# Altium PCB PCB1.PcbDoc
Units mm, origin at the board's own origin, x right, y up, seen from the top; angles counter-clockwise.
Board outline 99.95 x 99.82 mm, 2 copper layers (Top Layer, Bottom Layer); 25 components, 30 nets, 135 pads, 0 vias.
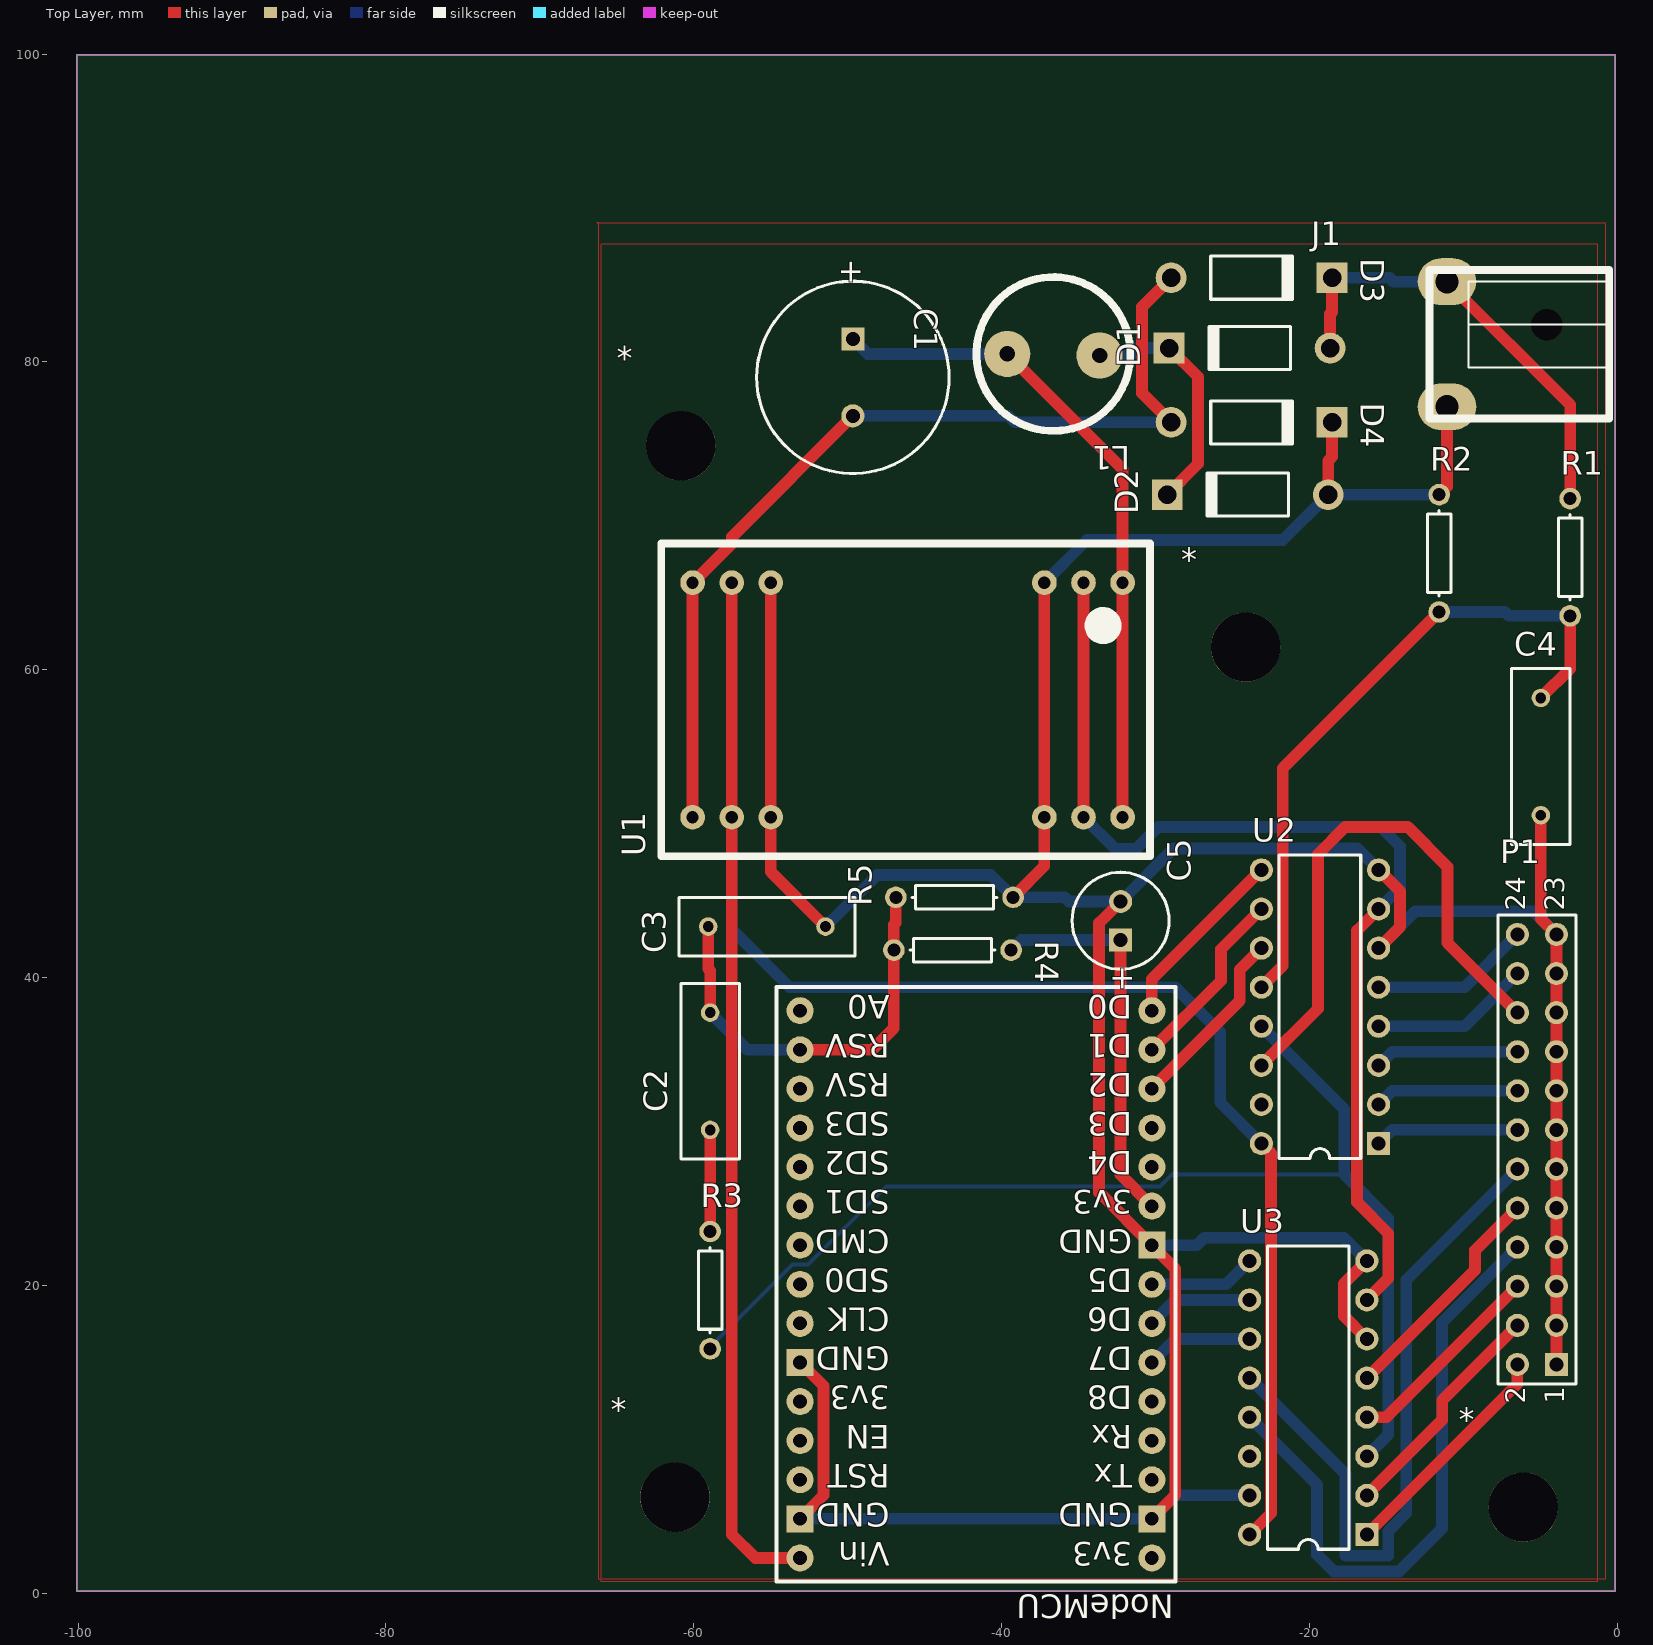
[diagram p0: Top Layer view]
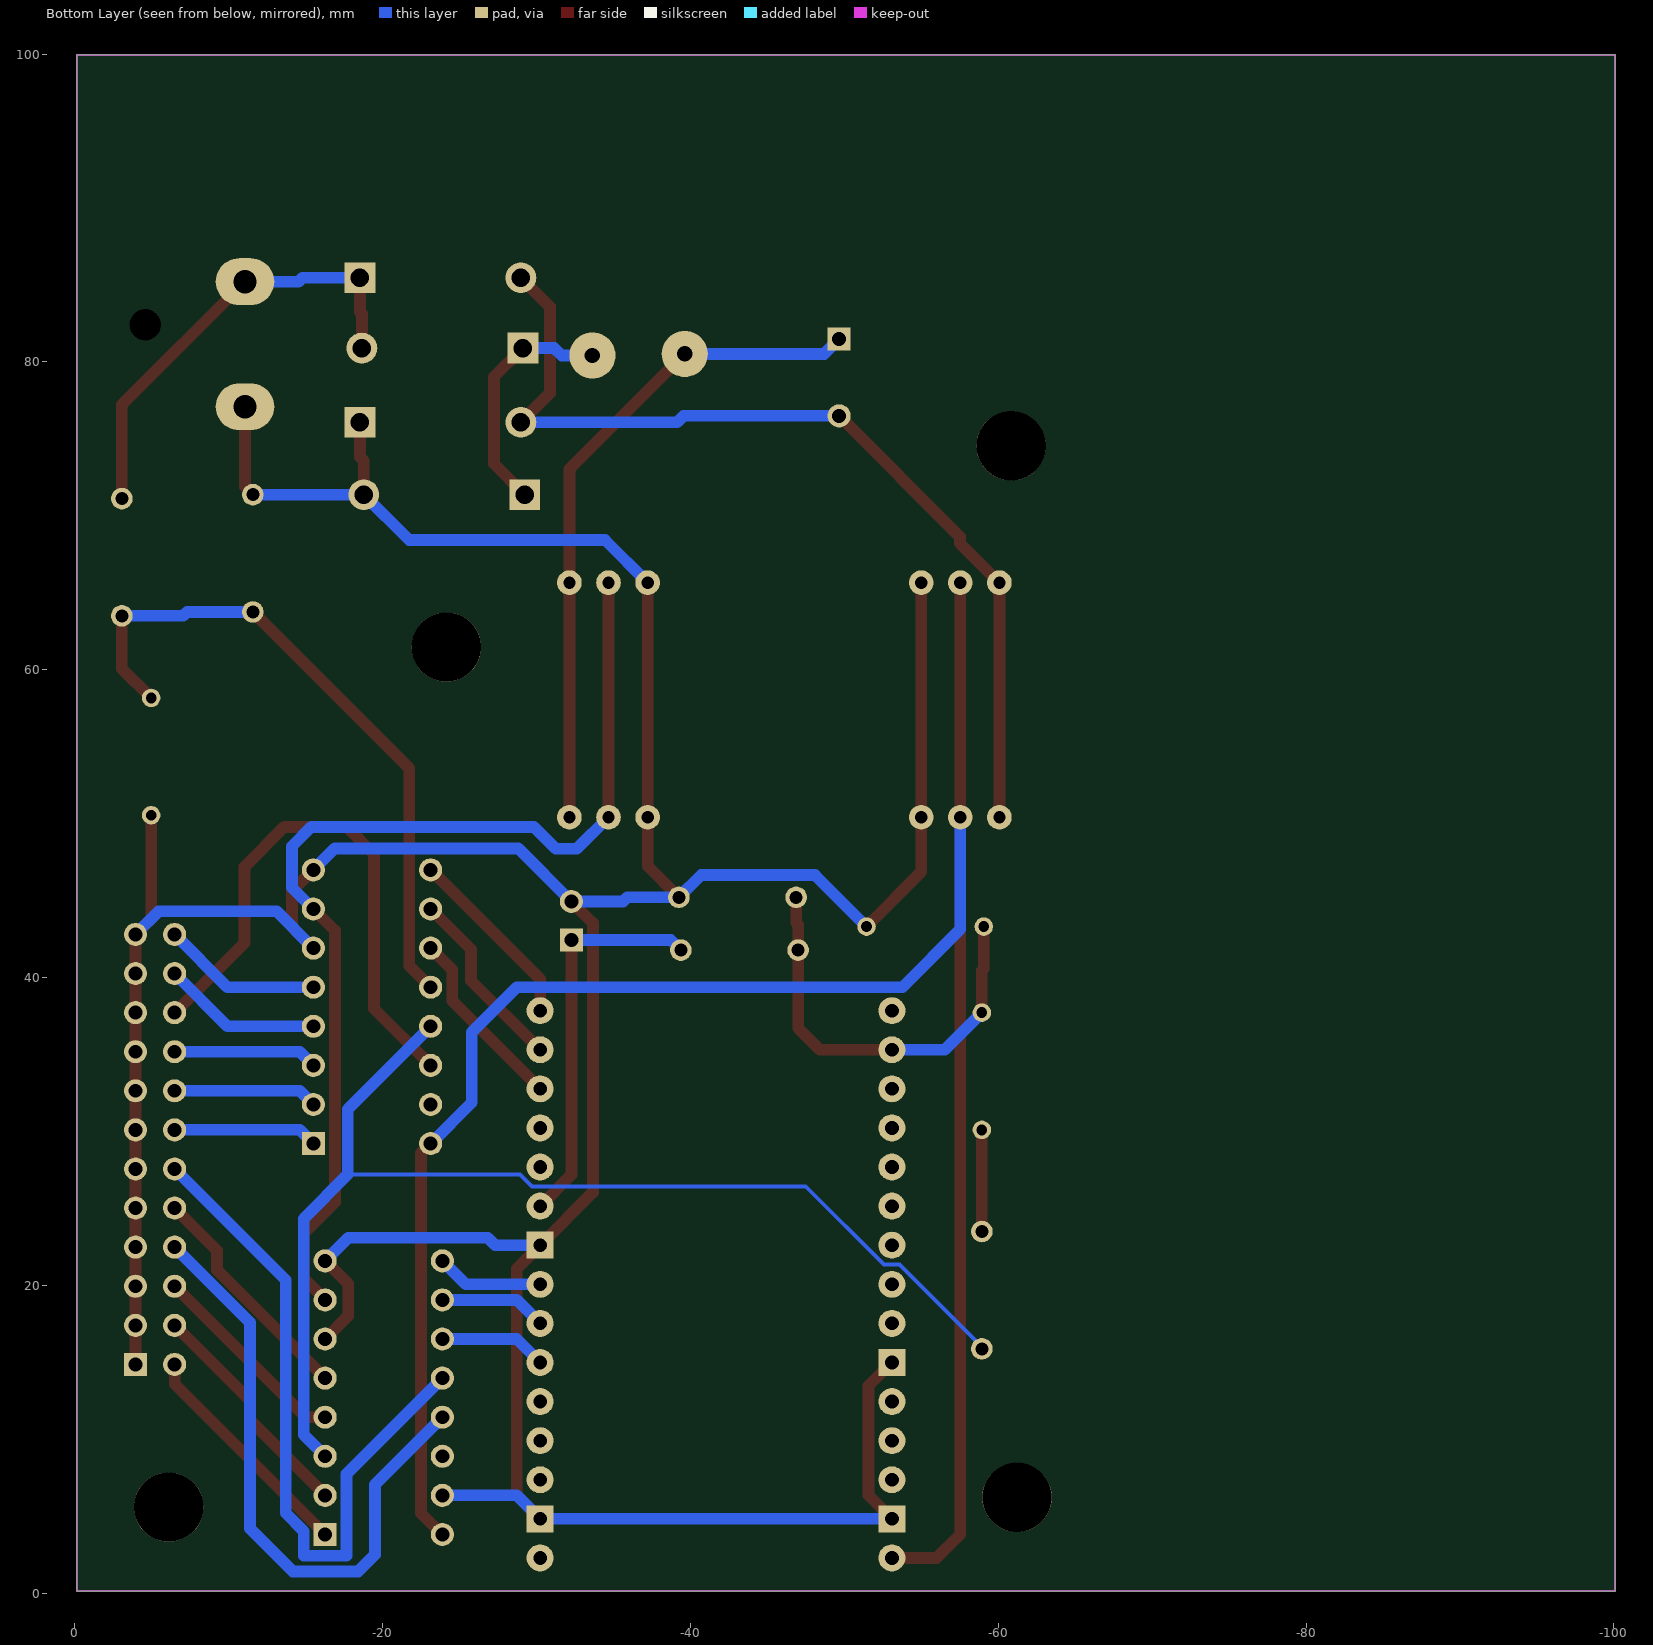
[diagram p1: Bottom Layer view, seen from below]

## Layer stack, top to bottom
Top Solder: solder mask 0.0102, Solder Resist, Dk 3.5
Top Layer: signal copper 0.0356
Dielectric 1: dielectric 0.32, FR-4, Dk 4.8
Bottom Layer: signal copper 0.0356
Bottom Solder: solder mask 0.0102, Solder Resist, Dk 3.5

## Board outline
-100.076,0.127 -0.127,0.127 -0.127,99.949 -100.076,99.949

## Design rules (kind name [scope] priority, off if disabled: settings)
Clearance [All] p1: gap=0.254
PolygonConnect [All] p1: connectstyle=Relief reliefconductorwidth=0.254 reliefentries=4 polygonreliefangle="90 Angle" airgapwidth=0.254
RoutingVias [All] p1: holewidth=0.711 width=1.27 viastyle="Through Hole" minholewidth=0.711 minwidth=1.27 maxholewidth=0.711 maxwidth=1.27
SolderMaskExpansion [All] p1: expansion=0.102
Width [All] p1: maxlimit=2.54 minlimit=0.178 preferedwidth=0.762
30 further rules are at their usual default settings.

## Classes and differential pairs
component class Sheet1: * C1 C2 C3 C4 C5 D1 D2 D3 D4 J1 L1 NodeMCU P1 R1 R2 R3 R4 R5 U1 U2 U3

## Components (designator, comment, footprint, x,y, rotation, side; value= is the part's Value field where it differs from the comment)
* "M4 iso mount hole" "M4 hole" -61.214,6.223 r0 top
* "M4 iso mount hole" "M4 hole" -24.13,61.468 r0 top
* "M4 iso mount hole" "M4 hole" -60.833,74.549 r0 top
* "M4 iso mount hole" "M4 hole" -6.096,5.588 r0 top
C1 "Cap Pol1" CAPPR5-12.5x25 -49.657,78.994 r270 top
C2 "Cap" RAD-0.3 -58.928,33.909 r270 top
C3 "Cap" RAD-0.3 -55.245,43.307 r180 top
C4 "Cap" RAD-0.3 -4.953,54.356 r90 top
C5 "Cap Pol1" CAPPR2.5-6.3x6.8/H.9 -32.258,43.688 r90 top
D1 "Diode 1N4001" DO-41 -23.876,80.899 r180 top
D2 "Diode 1N4001" DO-41 -24.003,71.374 r180 top
D3 "Diode 1N4001" DO-41 -23.749,85.471 r0 top
D4 "Diode 1N4001" DO-41 -23.749,76.073 r0 top
J1 "Phonejack2" "Power jack 6x2mm" -12.192,76.327 r0 top
L1 "Inductor Iron" "Radial Vert Cylinder 10x19-6mm" -36.624,80.518 r180 top
NodeMCU "NodeMCU DevKit v1.0" "NodeMCU DevKit v1.0 - Inside Labels" -30.226,2.286 r180 top
P1 "Header 12X2" HDR2X12 -3.937,14.859 r90 top
R1 "Res1" AXIAL-0.3 -3.048,67.31 r90 top
R2 "Res1" AXIAL-0.3 -11.557,67.564 r90 top
R3 "Res1" AXIAL-0.3 -58.928,19.685 r90 top
R4 "Res1" AXIAL-0.3 -43.18,41.783 r0 top
R5 "Res1" AXIAL-0.3 -43.053,45.212 r180 top
U1 "EC3AW04" EC3AW -30.353,68.199 r180 top
U2 "MC74HC4051N" 648-08 -19.304,38.1 r90 top
U3 "MC74HC4051N" 648-08 -20.066,12.7 r90 top

## Footprints (in the part's own frame and the unit in brackets; to place one, negate y for a bottom-side part, rotate by r counter-clockwise, add the part's x,y. Pads: shape width x height; smd on the part's side, far side on the other; paste and mask are expansions set on the pad)
648-08 [mm] "DIP; 16 Leads; Row Spacing 7.62 mm; Pitch 2.54 mm"
  rect 1.5x1.5 hole 0.9: 1(-8.89,-3.81)
  round 1.5 hole 0.9: 2(-6.35,-3.81) 3(-3.81,-3.81) 4(-1.27,-3.81) 5(1.27,-3.81) 6(3.81,-3.81) 7(6.35,-3.81) 8(8.89,-3.81) 9(8.89,3.81) 10(6.35,3.81) 11(3.81,3.81) 12(1.27,3.81) 13(-1.27,3.81) 14(-3.81,3.81) 15(-6.35,3.81) 16(-8.89,3.81)
  silkscreen extent -9.85,-2.65 9.85,2.65
AXIAL-0.3 [mm] "Axial Device, Thru-Hole; 2 Leads; 0.3 in Pin Spacing"
  round 1.4 hole 0.85: 1(-3.81,0) 2(3.81,0)
  silkscreen extent -2.77,-0.76 2.77,0.76
CAPPR2.5-6.3x6.8/H.9 [mm] "Capacitor, Electrolytic, Radial; Body 6.3 x 6.8 mm (Dia.xH typ); Pin Spacing 2.5 mm (typ)"
  rect 1.5x1.5 hole 0.9: 1(-1.25,0)
  round 1.5 hole 0.9: 2(1.25,0)
  silkscreen extent -3.15,-3.15 3.15,3.15
CAPPR5-12.5x25 [mm] "Capacitor, Electrolytic, Radial; Body 12.5 x 25 mm (Dia.xH typ); Pin Spacing 5 mm (typ)"
  rect 1.5x1.5 hole 0.9: 1(-2.5,0)
  round 1.5 hole 0.9: 2(2.5,0)
  silkscreen extent -6.25,-6.25 6.25,6.25
DO-41 [mm] "Diode, Axial; Body 5.2 x 2.7 mm (LxDia. max), Lead Dia. 0.86 mm (max)"
  round 2 hole 1.2: 1(-5.23,0)
  rect 2x2 hole 1.2: 2(5.23,0)
  silkscreen extent -2.65,-1.4 2.75,1.4
EC3AW [mm]
  round 1.6 hole 0.8: 1(1.778,17.78) 1(1.778,2.54) 2(4.318,17.78) 2(4.318,2.54) 3(6.858,17.78) 3(6.858,2.54) 10(24.638,17.78) 10(24.638,2.54) 11(27.178,2.54) 11(27.178,17.78) 12(29.718,2.54) 12(29.718,17.78)
  silkscreen extent 0,0 31.75,20.32, body extent 0,0 31.75,20.32, height 10.16
HDR2X12 [mm] "Connector; Header; 12x2 Position"
  rect 1.5x1.5 hole 0.9: 1(0,0)
  round 1.5 hole 0.9: 2(0,2.54) 3(2.54,0) 4(2.54,2.54) 5(5.08,0) 6(5.08,2.54) 7(7.62,0) 8(7.62,2.54) 9(10.16,0) 10(10.16,2.54) 11(12.7,0) 12(12.7,2.54) 13(15.24,0) 14(15.24,2.54) 15(17.78,0) 16(17.78,2.54) 17(20.32,0) 18(20.32,2.54) 19(22.86,0) 20(22.86,2.54) 21(25.4,0) 22(25.4,2.54) 23(27.94,0) 24(27.94,2.54)
  silkscreen extent -1.27,-1.27 29.21,3.81
"M4 hole" [mm] "Isolated M4 mounting hole"
  round 4.5 hole 4.5 mask+2: 0(0,0)
"NodeMCU DevKit v1.0 - Inside Labels" [mil]
  round 69 hole 35: 1(0,0) 3(0,-200) 4(0,-300) 5(0,-400) 6(0,-500) 7(0,-600) 8(0,-700) 10(0,-900) 11(0,-1000) 12(0,-1100) 13(0,-1200) 14(0,-1300) 15(0,-1400) 16(900,-1400) 17(900,-1300) 18(900,-1200) 19(900,-1100) 20(900,-1000) 21(900,-900) 22(900,-800) 23(900,-700) 24(900,-600) 26(900,-400) 27(900,-300) 28(900,-200) 30(900,0)
  rect 69x69 hole 35: 2(0,-100) 9(0,-800) 25(900,-500) 29(900,-100)
  silkscreen extent -60,-1460 960,60
"Power jack 6x2mm" [mil]
  round 0 hole 80 unplated: key(300,240)
  oval 150x120 hole 60: S(45,30) T(45,350)
  silkscreen extent 0,0 460,380, body extent 0,0 460,380, height 270
RAD-0.3 [mm] "Radial Cap, Thru-Hole; 2 Leads; 0.3 in Pin Spacing"
  round 1.2 hole 0.7: 1(-3.81,0) 2(3.81,0)
  silkscreen extent -5.71,-1.91 5.71,1.91
"Radial Vert Cylinder 10x19-6mm" [mm]
  round 3 hole 1: 1(-3,0.1) 2(3,0)
  silkscreen extent -5,-5 5,5, body extent -5,-5 5,5, height 19

## Part data
C1 C5: "Polarized Capacitor (Radial)"
C2 C3 C4: "Capacitor"
D1 D2 D3 D4: "1 Amp General Purpose Rectifier"
J1: "Jack Socket, 1/4\" [6.5mm], Thru-Hole, Vertical, 2-Conductor Open Circuit"
L1: "Magnetic-Core Inductor"
P1: "Header, 12-Pin, Dual row"
R1 R2 R3 R4 R5: "Resistor"
U2 U3: "8-Channel Analog Multiplexer/Demultiplexer"

## Nets (pads, with @x,y where several pads share a name; then routed paths per layer and width w, separated by ;. In a path a pad name is that pad's centre, name@x,y a point inside that pad or via, vN(x,y) a via of type N, cw(c..) or ccw(c..) an arc to the next point about the centre after c; other vN are vias at no path point)
A1: NodeMCU.13 U2.11 | length 12.1
  Top Layer w0.762: NodeMCU.13 -24.511,38.481 -24.511,40.513 U2.11
A2: NodeMCU.8 U3.9 | length 7
  Bottom Layer w0.762: NodeMCU.8 -25.4,20.066 U3.9
ADC: C2.1 C3.2 NodeMCU.17 R4.1 R5.2 | length 27.7
  Top Layer w0.762: C3.2 -59.055,40.564 -58.928,40.437 C2.1 ; NodeMCU.17 -48.387,35.306 -46.99,36.703 R4.1 -46.99,43.434 -46.863,43.561 R5.2
  Bottom Layer w0.762: C2.1 -56.515,35.306 NodeMCU.17
B1: NodeMCU.14 U2.10 | length 12.1
  Top Layer w0.762: NodeMCU.14 -25.736,39.796 -25.736,41.828 U2.10
B2: NodeMCU.6 U3.11 | length 7
  Bottom Layer w0.762: NodeMCU.6 -28.702,16.51 U3.11
C1: NodeMCU.15 U2.9 | length 12.1
  Top Layer w0.762: NodeMCU.15 -30.226,39.878 U2.9
C2: NodeMCU.7 U3.10 | length 7
  Bottom Layer w0.762: NodeMCU.7 -28.702,19.05 U3.10
GND: C3.1 C4.1 C5.2 D2.1 D4.2 J1.S NodeMCU.2 NodeMCU.9 NodeMCU.25 NodeMCU.29 P1.1 P1.3 P1.5 P1.7 P1.9 P1.11 P1.13 P1.15 P1.17 P1.19 P1.21 P1.23 R2.2 R5.1 U1.3 U1.10 U2.6 U2.8 U3.6 U3.8 U3.15 | length 285.2
  Top Layer w0.762: U1.10@-54.991,65.659 -54.991,50.419 -54.991,46.863 C3.1 ; NodeMCU.29 -51.562,6.35 -51.562,13.462 NodeMCU.25 ; R5.1 -37.211,47.244 -37.211,50.419 U1.3@-37.211,65.659 ; C5.2 -33.655,43.541 -33.655,26.035 NodeMCU.9 -28.702,21.082 -28.702,6.35 NodeMCU.2 ; D2.1 -18.773,73.584 -18.519,73.838 D4.2 ; U3.6 -17.755,18.009 -17.755,20.091 U3.8 ; U2.6 -14.097,43.307 -14.097,45.593 U2.8 ; R2.2 -11.049,71.882 J1.S ; C4.1 -4.953,43.815 P1.23 P1.21 P1.19 P1.17 P1.15 P1.13 P1.11 P1.9 P1.7 P1.5 P1.3 P1.1
  Bottom Layer w0.762: NodeMCU.29 NodeMCU.2 -28.702,6.35 U3.15 ; C3.1 -48.082,46.66 -40.691,46.66 R5.1 -35.89,45.212 -35.616,44.938 C5.2 -28.809,48.387 -16.891,48.387 U2.8 ; U1.3@-37.211,65.659 -34.442,68.428 -21.719,68.428 D2.1 R2.2 ; NodeMCU.9 -27.305,22.606 -26.822,23.089 -17.755,23.089 U3.8 ; U2.6 -13.106,44.298 -5.436,44.298 P1.23
NetC1_1: C1.1 L1.2 U1.1 | length 43.6
  Top Layer w0.762: L1.2 -32.131,73.025 -32.131,65.659 U1.1@-32.131,50.419
  Bottom Layer w0.762: C1.1 -48.681,80.518 L1.2
NetC1_2: C1.2 D3.1 D4.1 U1.12 | length 62.2
  Top Layer w0.762: U1.12@-60.071,50.419 -60.071,65.659 -57.506,68.224 -57.506,68.645 C1.2 ; D4.1 -30.861,77.955 -30.861,83.589 D3.1
  Bottom Layer w0.762: C1.2 -39.548,76.494 -39.127,76.073 D4.1
NetC2_2: C2.2 R3.2 | length 6.6
  Top Layer w0.762: R3.2 C2.2
NetC4_2: C4.2 R1.1 R2.1 U2.12 | length 43.9
  Top Layer w0.762: U2.12 -21.717,40.767 -21.717,53.594 R2.1 ; C4.2 -3.048,60.071 R1.1
  Bottom Layer w0.762: R2.1 -7.29,63.754 -7.036,63.5 R1.1
NetC5_1: C5.1 NodeMCU.10 R4.2 | length 25.5
  Top Layer w0.762: C5.1 -32.258,27.178 NodeMCU.10
  Bottom Layer w0.762: R4.2 -38.715,42.438 C5.1
NetD1_2: D1.2 D2.2 L1.1 | length 15.8
  Top Layer w0.762: D2.2 -27.229,73.378 -27.229,79.022 D1.2
  Bottom Layer w0.762: L1.1 -31.623,80.418 -31.142,80.899 D1.2
NetP1_2: P1.2 U3.1 | length 15.1
  Top Layer w0.762: U3.1 -6.477,13.589 P1.2
NetP1_4: P1.4 U3.2 | length 15.1
  Top Layer w0.762: U3.2 -11.354,11.252 -11.354,12.522 P1.4
NetP1_6: P1.6 U3.4 | length 13.3
  Top Layer w0.762: U3.4 -14.986,11.43 P1.6
NetP1_8: P1.8 U3.13 | length 40.8
  Bottom Layer w0.762: U3.13 -19.492,7.046 -19.492,2.486 -18.415,1.409 -14.161,1.409 -11.379,4.191 -11.379,17.577 P1.8
NetP1_10: P1.10 U3.5 | length 15.1
  Top Layer w0.762: U3.5 -9.225,21.001 -9.225,22.271 P1.10
NetP1_12: P1.12 U3.12 | length 45.5
  Bottom Layer w0.762: U3.12 -17.641,7.735 -17.641,2.425 -14.871,2.425 -14.871,4.027 -13.691,5.207 -13.691,20.345 P1.12
NetP1_14: P1.14 U2.1 | length 9.4
  Bottom Layer w0.762: U2.1 -14.605,30.099 P1.14
NetP1_16: P1.16 U2.2 | length 9.4
  Bottom Layer w0.762: U2.2 -14.605,32.639 P1.16
NetP1_18: P1.18 U2.3 | length 9.4
  Bottom Layer w0.762: U2.3 -14.605,35.179 P1.18
NetP1_20: P1.20 U2.14 | length 36.8
  Top Layer w0.762: U2.14 -19.431,37.973 -19.431,48.006 -17.653,49.784 -13.614,49.784 -11.024,47.193 -11.024,42.266 P1.20
NetP1_22: P1.22 U2.4 | length 10.4
  Bottom Layer w0.762: U2.4 -9.906,36.83 P1.22
NetP1_24: P1.24 U2.5 | length 10.4
  Bottom Layer w0.762: U2.5 -9.906,39.37 P1.24
NetR3_1: R3.1 U2.13 U3.3 | length 77.9
  Bottom Layer w0.254: R3.1 -58.928,16.002 -53.581,21.349 -52.565,21.349 -47.485,26.429 -29.705,26.429 -28.931,27.203 -17.729,27.203
  Bottom Layer w0.762: U2.13 -17.729,31.445 -17.729,27.203 -14.859,24.333 -14.859,10.287 U3.3
VCC: NodeMCU.30 U1.11 U2.16 U3.16 | length 143.3
  Top Layer w0.762: U1.11@-57.531,65.659 -57.531,50.419 -57.531,3.81 -56.007,2.286 NodeMCU.30 ; U3.16 -22.479,5.207 -22.479,28.575 U2.16
  Bottom Layer w0.762: U1.11@-57.531,50.419 -57.531,43.129 -53.772,39.37 -28.702,39.37 -25.781,36.449 -25.781,31.877 U2.16
VEE: U1.2 U2.7 U3.7 | length 69.8
  Top Layer w0.762: U1.2@-34.671,50.419 U1.2@-34.671,65.659 ; U3.7 -14.859,20.447 -14.859,23.368 -16.891,25.4 -16.891,43.053 U2.7
  Bottom Layer w0.762: U1.2@-34.671,50.419 -32.614,48.362 -31.242,48.362 -29.82,49.784 -15.367,49.784 -14.097,48.514 -14.097,45.847 U2.7
"~12.8V RMS": D1.1 D3.2 J1.T R1.2 | length 29.6
  Top Layer w0.762: D1.1 -18.646,83.109 -18.519,83.236 D3.2 ; J1.T -3.048,77.216 R1.2
  Bottom Layer w0.762: D3.2 -14.783,85.471 -14.529,85.217 J1.T
pads on no net: *.0 J1.key NodeMCU.1 NodeMCU.3 NodeMCU.4 NodeMCU.5 NodeMCU.11 NodeMCU.12 NodeMCU.16 NodeMCU.18 NodeMCU.19 NodeMCU.20 NodeMCU.21 NodeMCU.22 NodeMCU.23 NodeMCU.24 NodeMCU.26 NodeMCU.27 NodeMCU.28 U2.15 U3.14

## Polygon pours and split planes (outlines as drawn)
GND on Top Layer "NONET_L01_P002" (solid, remove dead copper, shelved, pour order 2): -66.294,89.027 -0.762,89.027 -0.762,0.889 -66.167,0.889 -66.167,89.027
GND on Top Layer "NONET_L01_P004" (solid, remove dead copper, shelved, pour order 4): -1.27,87.63 -66.04,87.63 -66.04,0.762 -1.27,0.762

## Keep-outs
Keep-Out Layer:
  the board outline again, w0.127

## Text inside footprints (layer, text, board x,y; h text height)
C1: Top Overlay "+" at -50.407,86.719 h1.5 r270
C5: Top Overlay "+" at -31.508,39.063 h1.5 r90
NodeMCU: Top Overlay "Vin" at -47.244,3.302 h1.52 r180; Top Overlay "GND" at -47.244,5.842 h1.52 r180; Top Overlay "RST" at -47.244,8.382 h1.52 r180; Top Overlay "EN" at -47.244,10.922 h1.52 r180; Top Overlay "3v3" at -47.244,13.462 h1.52 r180; Top Overlay "GND" at -47.244,16.002 h1.52 r180; Top Overlay "CLK" at -47.244,18.542 h1.52 r180; Top Overlay "SD0" at -47.244,21.082 h1.52 r180; Top Overlay "CMD" at -47.244,23.622 h1.52 r180; Top Overlay "SD1" at -47.244,26.162 h1.52 r180; Top Overlay "SD2" at -47.244,28.702 h1.52 r180; Top Overlay "SD3" at -47.244,31.242 h1.52 r180; Top Overlay "RSV" at -47.244,33.782 h1.52 r180; Top Overlay "RSV" at -47.244,36.322 h1.52 r180; Top Overlay "A0" at -47.244,38.862 h1.52 r180; Top Overlay "D0" at -31.496,38.862 h1.52 r180; Top Overlay "D1" at -31.496,36.322 h1.52 r180; Top Overlay "D2" at -31.496,33.782 h1.52 r180; Top Overlay "D3" at -31.496,31.242 h1.52 r180; Top Overlay "D4" at -31.496,28.702 h1.52 r180; Top Overlay "3v3" at -31.496,26.162 h1.52 r180; Top Overlay "GND" at -31.496,23.622 h1.52 r180; Top Overlay "D5" at -31.496,21.082 h1.52 r180; Top Overlay "D6" at -31.496,18.542 h1.52 r180; Top Overlay "D7" at -31.496,16.002 h1.52 r180; Top Overlay "D8" at -31.496,13.462 h1.52 r180; Top Overlay "Rx" at -31.496,10.922 h1.52 r180; Top Overlay "Tx" at -31.496,8.382 h1.52 r180; Top Overlay "GND" at -31.496,5.842 h1.52 r180; Top Overlay "3v3" at -31.496,3.302 h1.52 r180
P1: Top Overlay "1" at -3.429,12.319 h1.27 r90; Top Overlay "2" at -5.969,12.319 h1.27 r90; Top Overlay "23" at -3.429,44.323 h1.27 r90; Top Overlay "24" at -5.969,44.323 h1.27 r90